# EAGLE board fabkit (EAGLE 7.1.0)
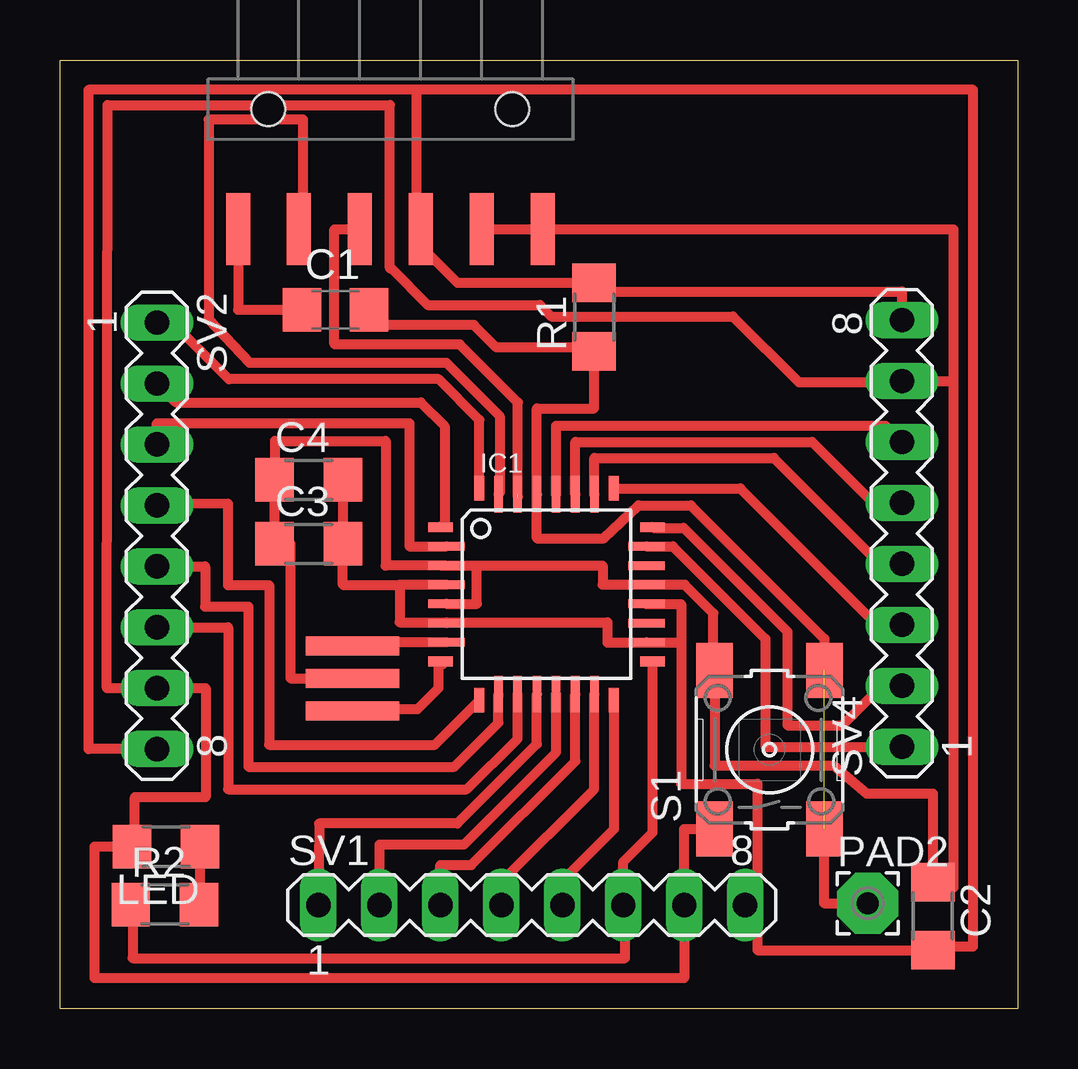
[diagram p0: board, top side]

Size 39.9 x 39.55 mm. Coordinates in mm from the lower left corner, seen from the top.
Outline: 0,39.55 39.9,39.55 39.9,0 0,0 0,39.55
Copper layers (1*16): Top 0.035mm / dielectric 1.5mm / Bottom 0.035mm
Design rules "default *": minimum track width 10mil, minimum drill 24mil, track to track 16mil, track to pad 16mil, pad to pad 16mil, via to via 16mil, smd to smd 16mil, copper to edge 16mil, drill to drill 8mil, minimum pad ring 10mil, minimum via ring 8mil, stop-mask expansion 4mil, vias tented up to drill 0mil, thermal gap 10mil

## Footprints (pad centres in the part's own frame; a part is rotated, then mirrored left to right if it is on the bottom)
C1206 = smd 1.6 x 1.8: 1 -1.4,0; 2 1.4,0
1206 = smd 1.6 x 1.803: 1 -1.422,0; 2 1.422,0
TQFP32-08 = smd 1.016 x 0.406: 1 -4.42,2.8; 8 -4.42,-2.8; 17 4.42,-2.8; 24 4.42,2.8 | smd 1.524 x 0.356: 2 -4.166,2; 3 -4.166,1.2; 4 -4.166,0.4; 5 -4.166,-0.4; 6 -4.166,-1.2; 7 -4.166,-2; 18 4.166,-2; 19 4.166,-1.2; 20 4.166,-0.4; 21 4.166,0.4; 22 4.166,1.2; 23 4.166,2 | smd 0.406 x 1.016: 9 -2.8,-4.42; 16 2.8,-4.42; 25 2.8,4.42; 32 -2.8,4.42 | smd 0.356 x 1.524: 10 -2,-4.166; 11 -1.2,-4.166; 12 -0.4,-4.166; 13 0.4,-4.166; 14 1.2,-4.166; 15 2,-4.166; 26 2,4.166; 27 1.2,4.166; 28 0.4,4.166; 29 -0.4,4.166; 30 -1.2,4.166; 31 -2,4.166
1X06-SMD = smd 1 x 3: 1 -6.35,5; 2 -3.81,5; 3 -1.27,5; 4 1.27,5; 5 3.81,5; 6 6.35,5 | hole 1.4: -5.08,0; 5.08,0
2,54/0,9 = drill 0.914 pad 2.54 octagon: 1 0,0
6MM_SWITCH = smd 2.286 x 1.524: 1 -3.302,2.286; 2 3.302,2.286; 3 -3.302,-2.286; 4 3.302,-2.286
MA08-1 = drill 1.016 long: 1 -8.89,0; 2 -6.35,0; 3 -3.81,0; 4 -1.27,0; 5 1.27,0; 6 3.81,0; 7 6.35,0; 8 8.89,0
EFOBM = smd 0.8 x 3.9: 1 -1.35,0; 2 0,0; 3 1.35,0

## Placement (x,y rotation side)
C1  .1uf  [C1206]  11.48,29.13 0 top
C2  1uf  [1206]  36.37,3.86 270 top
C3  .1uf  [1206]  10.36,19.38 0 top
C4  10uf  [1206]  10.36,22.05 0 top
IC1  ATMEGA48/88/168-AU  [TQFP32-08]  20.27,17.27 0 top
JP1  [1X06-SMD]  13.77,37.49 180 top
LED  [1206]  4.42,6.76 180 top
PAD2  WIREPAD2,54/0,9  [2,54/0,9]  33.66,4.39 0 top
R1  10k  [1206]  22.25,28.83 90 top
R2  499  [1206]  4.37,4.34 0 top
S1  [6MM_SWITCH]  29.57,10.79 90 top
SV1  [MA08-1]  19.66,4.32 0 top
SV2  [MA08-1]  4.04,19.71 270 top
SV4  [MA08-1]  35.08,19.81 90 top
U$2  RESONATOREFOB  [EFOBM]  12.19,13.77 90 top

## Library data of the parts
C1 = rcl
C2-C4 LED R1 R2 S1 = ng
IC1 = atmega8
JP1 = SparkFun
PAD2 = wirepad
SV1 SV2 SV4 = con-lstb
U$2 = fab

## Nets
DTR: C1.1 JP1.6
GND: C2.1 C3.1 C4.1 IC1.3 IC1.5 IC1.21 JP1.1 JP1.2 LED.2 S1.1 S1.2 SV1.7 SV2.7 SV4.7 U$2.2
MISO: IC1.16 SV1.5
MOSI: IC1.15 SV1.4
N$1: IC1.8 U$2.1
N$2: IC1.12 SV1.1
N$3: IC1.23 SV4.1
N$4: IC1.24 SV4.2
N$5: IC1.25 SV4.3
N$6: IC1.26 SV4.4
N$7: IC1.27 SV4.5
N$8: IC1.28 SV4.6
N$9: IC1.7 U$2.3
N$10: IC1.32 SV2.1
N$11: IC1.1 SV2.2
N$12: IC1.2 SV2.3
N$13: IC1.9 SV2.4
N$14: IC1.10 SV2.5
N$15: IC1.11 SV2.6
N$17: IC1.13 SV1.2
N$18: IC1.14 SV1.3
N$23: LED.1 R2.2
RST: C1.2 IC1.29 PAD2.1 R1.1 S1.3 S1.4
RX: IC1.30 JP1.4
SCK: IC1.17 R2.1 SV1.6
TX: IC1.31 JP1.5
VCC: C2.2 C3.2 C4.2 IC1.4 IC1.6 IC1.18 IC1.20 JP1.3 R1.2 SV1.8 SV2.8 SV4.8

## Tracks (layer width: path | path; a pad name or v marks a point on that pad's centre or on a via)
DTR
  Top 0.406: JP1.6 7.42,29.13 C1.1
GND
  Top 0.356: 24.33,17.68 24.33,17.67 IC1.21
  Top 0.406: 15.9,18.47 15.88,18.47 | 15.9,18.47 17.37,18.47 | 15.9,18.47 15.93,18.47 | 15.93,18.47 IC1.3 13.56,18.47 13.56,23.67 8.97,23.67 8.97,22.07 C4.1 C3.1 9.6,19.38 9.6,13.77 U$2.2 | 15.93,18.47 | JP1.2 JP1.1 37.24,32.49 37.24,26.16 | 17.37,18.47 22.61,18.47 22.61,17.68 IC1.21 26.04,17.67 27.23,16.48 27.23,13.51 S1.2 27.28,10.13 32.23,10.13 33.6,8.97 36.37,8.97 C2.1 36.27,5.05 37.24,5.05 37.24,26.16 | IC1.5 17.37,16.87 17.37,18.47 | 37.24,26.16 SV4.7 35.03,26.11 30.79,26.11 28.04,28.85 20.47,28.85 19.99,29.34 15.32,29.34 13.79,30.86 13.74,30.86 13.74,37.67 1.98,37.67 1.96,13.36 SV2.7 6.07,13.36 6.07,8.81 3.12,8.81 3.12,6.88 LED.2 1.45,6.76 1.45,1.27 26.01,1.27 SV1.7 26.01,7.49 S1.1
MISO
  Top 0.406: SV1.5 20.93,5.33 23.09,7.49 23.09,12.83 IC1.16
MOSI
  Top 0.406: SV1.4 18.39,5.28 22.25,9.14 22.25,13.09 IC1.15
N$1
  Top 0.406: 15.95,14.37 IC1.8 15.77,14.4 15.77,13.36 14.91,12.49 12.19,12.49 U$2.1
N$2
  Top 0.406: SV1.1 10.79,7.72 16.56,7.72 19.87,11.03 IC1.12
N$3
  Top 0.406: IC1.23 25.53,19.27 29.39,15.42 29.39,10.92 SV4.1
N$4
  Top 0.406: 24.64,20.07 IC1.24 24.72,20.04 25.98,20.04 30.3,15.72 30.3,11.81 32.59,11.81 34.19,13.41 35.03,13.41 SV4.2
N$5
  Top 0.406: IC1.25 28.35,21.69 34.06,15.98 35.05,15.98 SV4.3
N$6
  Top 0.406: 22.25,21.44 IC1.26 22.27,22.96 29.74,22.96 34.27,18.44 34.98,18.44 SV4.4
N$7
  Top 0.406: IC1.27 21.47,23.62 31.34,23.62 34.01,20.95 34.95,20.95 SV4.5
N$8
  Top 0.406: IC1.28 20.67,24.31 34.39,24.31 34.39,23.62 SV4.6
N$9
  Top 0.406: IC1.7 12.35,15.27 arc90 U$2.3
N$10
  Top 0.406: IC1.32 17.47,24.54 15.77,26.24 7.04,26.24 4.67,28.6 SV2.1
N$11
  Top 0.406: SV2.2 4.83,25.27 15.04,25.27 16.03,24.28 16.03,20.25 IC1.1
N$12
  Top 0.406: SV2.3 4.04,24.41 14.55,24.41 14.55,19.27 IC1.2
N$13
  Top 0.406: 17.47,12.64 IC1.9 15.62,11 8.71,11 8.71,17.65 7.01,17.65 7.01,21.06 4.04,21.03 SV2.4
N$14
  Top 0.406: SV2.5 6.04,18.44 6.04,16.76 7.85,16.76 7.85,10.08 16.43,10.08 18.26,11.91 18.26,13.02 IC1.10
N$15
  Top 0.406: IC1.11 19.07,11.25 16.94,9.14 7.01,9.14 7.01,15.9 SV2.6
N$17
  Top 0.406: SV1.2 13.31,6.83 16.82,6.83 20.67,10.69 IC1.13
N$18
  Top 0.406: SV1.3 15.85,5.99 17.14,5.99 21.47,10.32 IC1.14
N$23
  Top 0.406: R2.2 5.97,4.34 5.84,4.47 LED.1
RST  (1 unrouted)
  Top 0.406: S1.3 31.83,7.49 31.83,4.39 PAD2.1 | C1.2 13.52,28.5 17.25,28.5 18.19,27.56 22.1,27.56 R1.1 22.25,25.03 19.87,25.03 IC1.29 19.87,19.61 22.66,19.61 24.11,20.98 26.29,20.98 31.85,15.42 S1.4
RX  (1 unrouted)
  Top 0.406: 12.52,32.29 12.52,32.61 12.62,32.77 12.5,32.28 12.65,32.9 JP1.4 11.43,32.49 11.43,27.71 11.46,27.69 16.66,27.69 19.07,25.27 19.07,21.34
SCK
  Top 0.305: 23.55,4.32 SV1.6
  Top 0.406: R2.1 3.02,3.63 3.02,2.11 23.55,2.11 23.55,4.32 | SV1.6 23.47,6.12 24.69,7.34 IC1.17
TX
  Top 0.406: JP1.5 10.13,32.59 10.13,37.06 6.2,37.06 6.2,28.75 7.9,26.92 16.1,26.92 18.31,24.71 18.31,21.48 IC1.31
VCC
  Top 0.254: 21.64,30.18 21.79,30.05 R1.2 | 14.86,32.69 JP1.3 15.19,32.69 | 1.32,38.3 1.19,38.3
  Top 0.305: IC1.20
  Top 0.406: 15.14,32.52 JP1.3 15.02,31.98 15.01,31.8 16.57,30.25 R1.2 22.61,29.9 35.08,29.9 SV4.8 | 21.77,30.2 21.64,30.18 21.61,30.2 | IC1.4 14.15,17.67 | 14.15,17.67 14.15,16.1 16.1,16.1 | 16.1,16.1 IC1.6 | 16.1,16.1 22.81,16.1 22.81,15.27 IC1.18 25.88,15.27 | IC1.20 25.88,16.87 25.88,15.27 | 25.88,15.27 25.88,9.37 29.06,9.37 29.06,4.27 | 29.06,4.27 28.55,4.27 SV1.8 | 29.06,4.27 29.06,2.44 C2.2 36.45,2.59 38.05,2.59 38.05,38.3 14.86,38.3 | SV2.8 1.19,10.82 1.19,38.3 14.86,38.3 | 14.86,32.69 14.86,38.3 | 14.15,17.67 11.79,17.67 C3.2 C4.2